# EAGLE board SysnapseWriless-BOB-Stack-v01 (EAGLE 5.10)
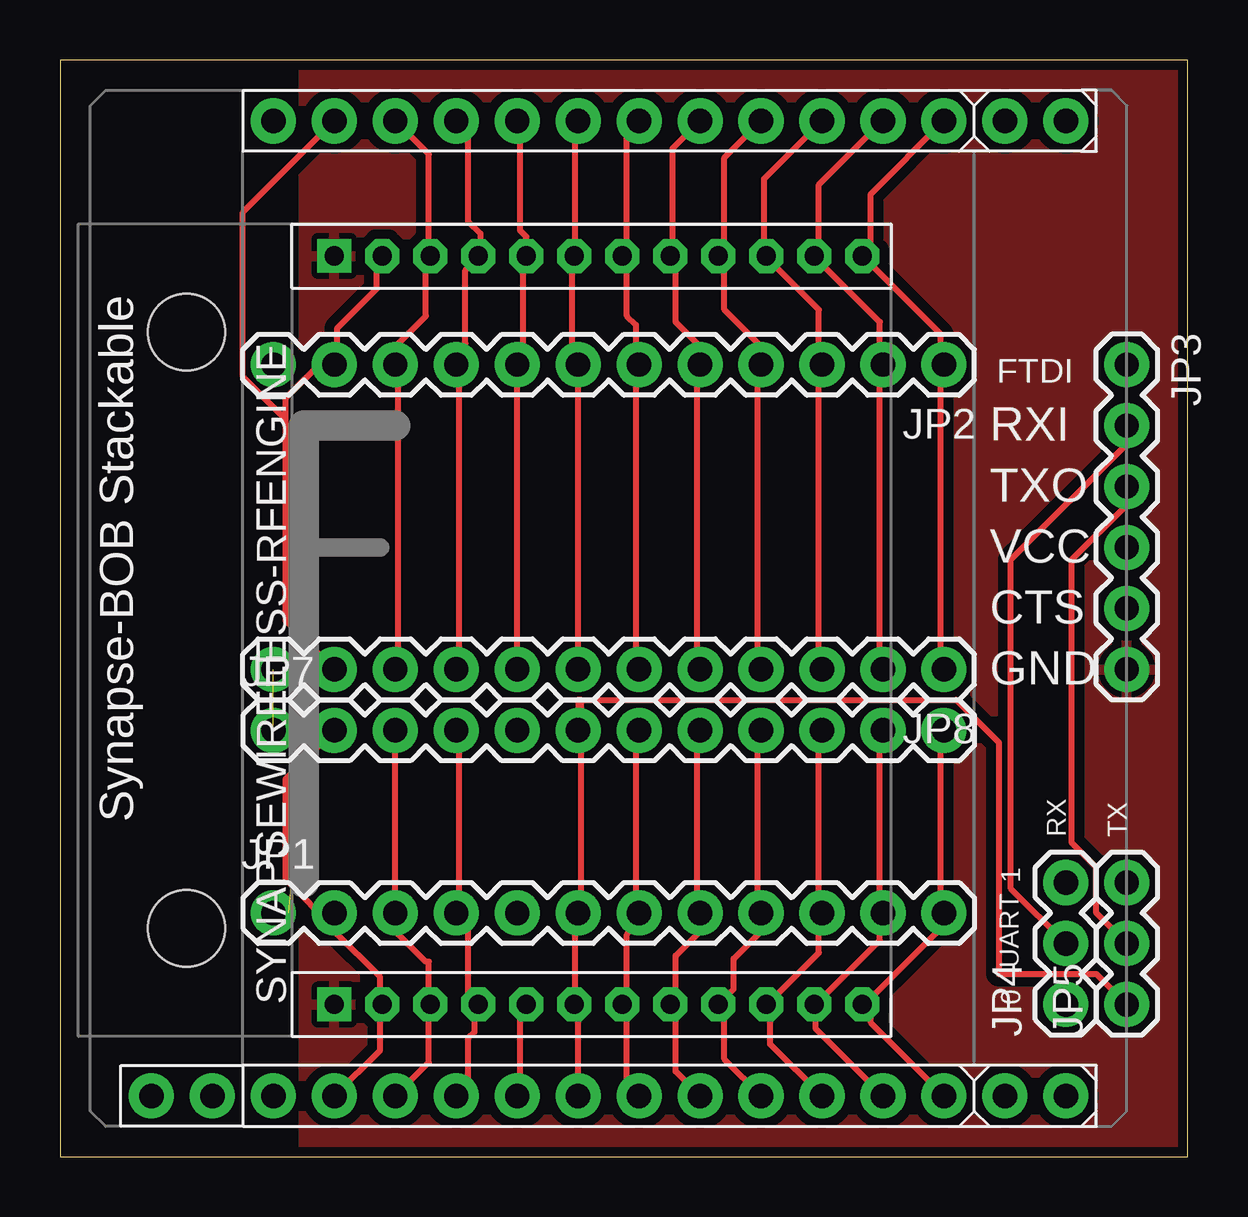
[diagram p0: board, top side]
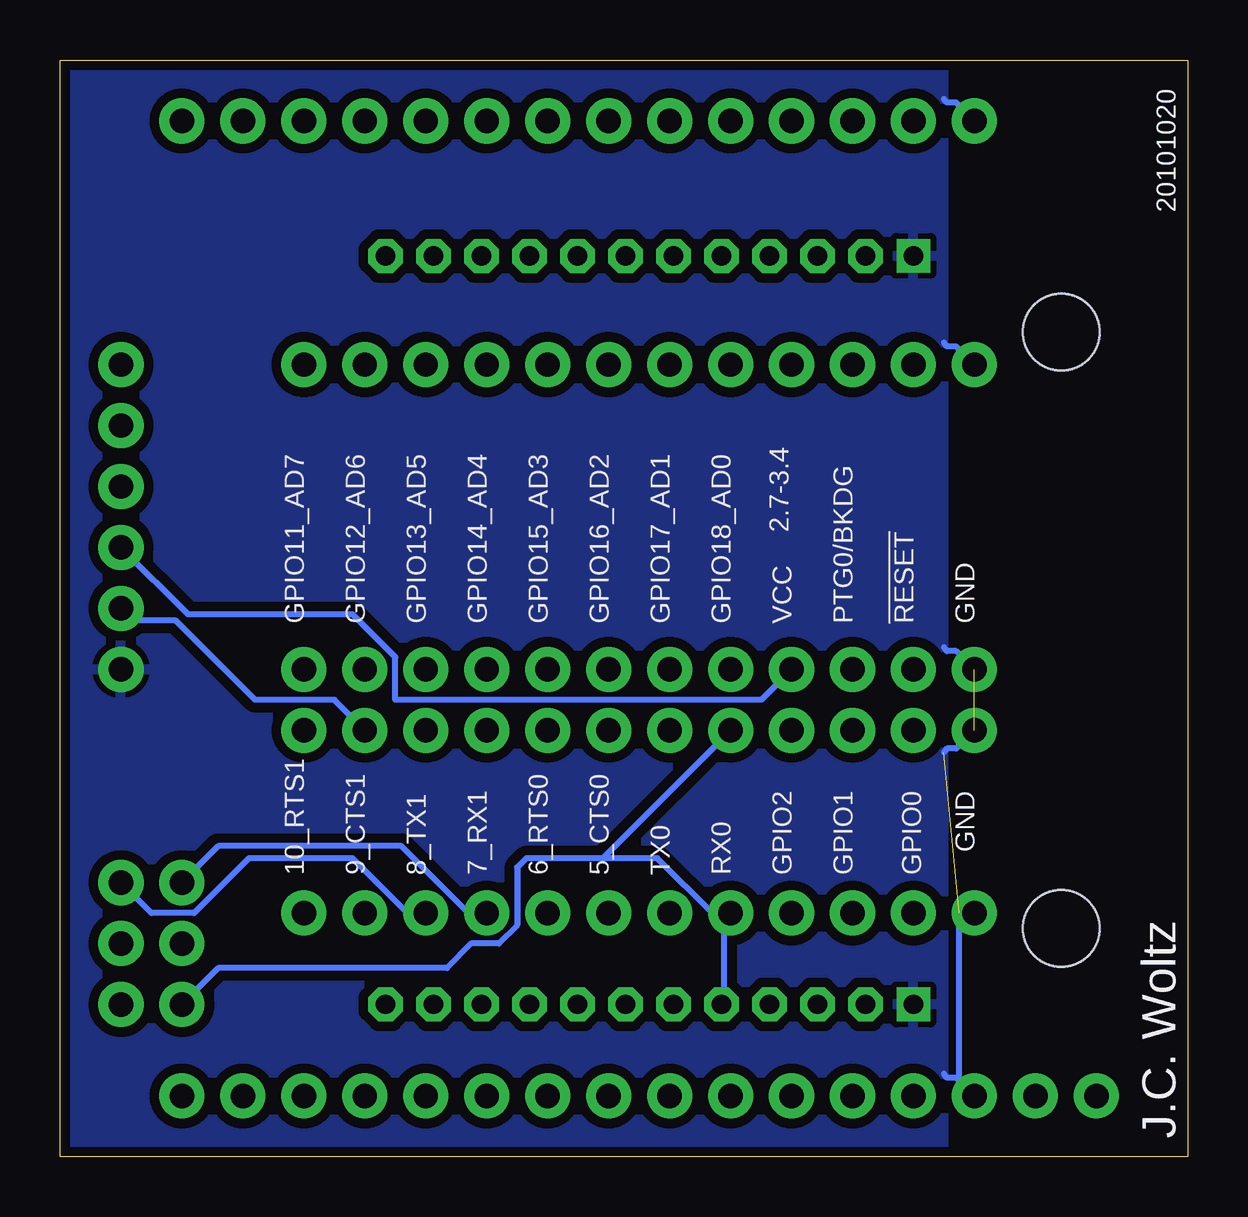
[diagram p1: board, bottom side, seen from below]

Size 46.99 x 45.72 mm. Coordinates in mm from the lower left corner, seen from the top.
Outline: 0,0 46.99,0 46.99,45.72 0,45.72 0,0
Copper layers (1*16): Top 0.0356mm / dielectric 1.5011mm / Bottom 0.0356mm
Design rules "LaenPCBOrder-JCModified": minimum track width 10mil, minimum drill 13mil, track to track 10mil, track to pad 6mil, pad to pad 6mil, via to via 6mil, smd to smd 6mil, copper to edge 15mil, drill to drill 6mil, minimum pad ring 12mil, minimum via ring 7mil, stop-mask expansion 4mil, vias tented up to drill 25mil, thermal gap 10mil

## Footprints (pad centres in the part's own frame; a part is rotated, then mirrored left to right if it is on the bottom)
1X12 = drill 1.016 pad 1.88 round: 1 0,0; 2 2.54,0; 3 5.08,0; 4 7.62,0; 5 10.16,0; 6 12.7,0; 7 15.24,0; 8 17.78,0; 9 20.32,0; 10 22.86,0; 11 25.4,0; 12 27.94,0
1X06 = drill 1.016 pad 1.88 round: 1 0,0; 2 2.54,0; 3 5.08,0; 4 7.62,0; 5 10.16,0; 6 12.7,0
1X03 = drill 1.016 pad 1.88 round: 1 0,0; 2 2.54,0; 3 5.08,0
SYNAPSERFENGINE-THM = drill 0.8 square: 1 0,0; 24 31.2,0 | drill 0.8 pad 1.422 octagon: 2 0,-2; 3 0,-4; 4 0,-6; 5 0,-8; 6 0,-10; 7 0,-12; 8 0,-14; 9 0,-16; 10 0,-18; 11 0,-20; 12 0,-22; 13 31.2,-22; 14 31.2,-20; 15 31.2,-18; 16 31.2,-16; 17 31.2,-14; 18 31.2,-12; 19 31.2,-10; 20 31.2,-8; 21 31.2,-6; 22 31.2,-4; 23 31.2,-2 | hole 3.2: 3.17,6.16; 28.03,6.16
SYNSJ-STACK = drill 1.016 pad 1.88 round: G0 0,-7.62; G1 0,-10.16; G2 0,-12.7; G3 0,-15.24; G4 0,-17.78; G5 0,-20.32; G6 0,-22.86; G7 0,-25.4; G8 0,-27.94; G9 0,-30.48; G10 0,-33.02; G11 40.64,-33.02; G12 40.64,-30.48; G13 40.64,-27.94; G14 40.64,-25.4; G15 40.64,-22.86; G16 40.64,-20.32; G17 40.64,-17.78; G18 40.64,-15.24; GND 0,-5.08; GND1 40.64,-5.08; R1 0,0; R2 0,-2.54; R3 0,-35.56; R4 0,-38.1; R5 40.64,-38.1; R6 40.64,-35.56; RESERVED 40.64,-10.16; RESET 40.64,-7.62; VCC 40.64,-12.7

## Placement (x,y rotation side)
JP1  M12PTH  [1X12]  8.89,10.16 0 top
JP2  M12PTH  [1X12]  36.83,33.02 180 top
JP3  [1X06]  44.45,33.02 270 top
JP4  JUMPER-3PTH  [1X03]  41.91,6.35 90 top
JP5  JUMPER-3PTH  [1X03]  44.45,6.35 90 top
JP7  M12PTH  [1X12]  8.89,17.78 0 top
JP8  M12PTH  [1X12]  36.83,20.32 180 top
SYNAPSEWIRELESS-RFENGINE  SYNAPSEWIRELESS-RFENGINESTD  [SYNAPSERFENGINE-THM]  11.43,6.35 90 top
U$1  SYNAPSE-SJ-STCKINGD30-1600  [SYNSJ-STACK]  3.81,2.54 90 top

## Library data of the parts
JP1-JP5 JP7 JP8 = SparkFun
SYNAPSEWIRELESS-RFENGINE U$1 = 0_jc-custom

## Nets
GND: JP1.1 JP2.12 JP3.6 JP7.1 JP8.12 SYNAPSEWIRELESS-RFENGINE.1 SYNAPSEWIRELESS-RFENGINE.24 U$1.GND U$1.GND1
GPIO0: JP1.2 JP7.2 SYNAPSEWIRELESS-RFENGINE.2 U$1.G0
GPIO1: JP1.3 JP7.3 SYNAPSEWIRELESS-RFENGINE.3 U$1.G1
GPIO2: JP1.4 JP7.4 SYNAPSEWIRELESS-RFENGINE.4 U$1.G2
GPIO3: JP1.5 JP4.1 JP7.5 SYNAPSEWIRELESS-RFENGINE.5 U$1.G3
GPIO4: JP1.6 JP5.1 JP7.6 SYNAPSEWIRELESS-RFENGINE.6 U$1.G4
GPIO5: JP1.7 JP7.7 SYNAPSEWIRELESS-RFENGINE.7 U$1.G5
GPIO6: JP1.8 JP7.8 SYNAPSEWIRELESS-RFENGINE.8 U$1.G6
GPIO7: JP1.9 JP4.3 JP7.9 SYNAPSEWIRELESS-RFENGINE.9 U$1.G7
GPIO8: JP1.10 JP5.3 JP7.10 SYNAPSEWIRELESS-RFENGINE.10 U$1.G8
GPIO9: JP1.11 JP3.5 JP7.11 SYNAPSEWIRELESS-RFENGINE.11 U$1.G9
GPIO10: JP1.12 JP7.12 SYNAPSEWIRELESS-RFENGINE.12 U$1.G10
GPIO11: JP2.1 JP8.1 SYNAPSEWIRELESS-RFENGINE.13 U$1.G11
GPIO12: JP2.2 JP8.2 SYNAPSEWIRELESS-RFENGINE.14 U$1.G12
GPIO13: JP2.3 JP8.3 SYNAPSEWIRELESS-RFENGINE.15 U$1.G13
GPIO14: JP2.4 JP8.4 SYNAPSEWIRELESS-RFENGINE.16 U$1.G14
GPIO15: JP2.5 JP8.5 SYNAPSEWIRELESS-RFENGINE.17 U$1.G15
GPIO16: JP2.6 JP8.6 SYNAPSEWIRELESS-RFENGINE.18 U$1.G16
GPIO17: JP2.7 JP8.7 SYNAPSEWIRELESS-RFENGINE.19 U$1.G17
GPIO18: JP2.8 JP8.8 SYNAPSEWIRELESS-RFENGINE.20 U$1.G18
N$3: JP2.10 JP8.10 SYNAPSEWIRELESS-RFENGINE.22 U$1.RESERVED
N$7: JP3.1
RESET_L: JP2.11 JP8.11 SYNAPSEWIRELESS-RFENGINE.23 U$1.RESET
RXI: JP3.2 JP4.2
TXO: JP3.3 JP5.2
VCC: JP2.9 JP3.4 JP8.9 SYNAPSEWIRELESS-RFENGINE.21 U$1.VCC

## Tracks (layer width: path | path; a pad name or v marks a point on that pad's centre or on a via)
GND  (2 unrouted)
  Bottom 0.254: 9.59,3.24 9.65,3.3 10.03,3.3 10.16,3.46 | U$1.GND 9.59,3.24 | JP1.1 9.53,10.16 9.53,3.3 9.59,3.24 | JP7.1 9.65,17.02 10.03,17.02 10.16,16.86 | JP8.12 9.65,21.08 10.03,21.08 10.16,21.24 | JP2.12 9.65,33.78 10.03,33.78 10.16,33.94 | U$1.GND1 9.65,43.94 10.03,43.94 10.16,44.1
  pour Bottom (isolate 0.406): 10.16,45.72 46.99,45.72 46.99,-1.27 10.16,-1.27
  pour Top (isolate 0.406): 10.16,45.72 46.99,45.72 46.99,-1.27 10.16,-1.27
GPIO0
  Top 0.254: 13.34,6.35 13.34,7.49 11.43,9.4 11.43,9.53 | U$1.G0 13.34,4.45 13.34,6.35 | 13.34,6.35 SYNAPSEWIRELESS-RFENGINE.2 | JP7.2 9.4,15.75 9.4,11.56 11.43,9.53 | 11.43,9.53 JP1.2
GPIO1
  Top 0.254: 15.37,6.35 15.37,8.13 15.24,8.13 13.97,9.4 JP1.3 JP7.3 | U$1.G1 15.37,3.94 15.37,6.35 | 15.37,6.35 SYNAPSEWIRELESS-RFENGINE.3
GPIO2
  Top 0.254: U$1.G2 17.02,3.05 17.02,4.95 17.27,5.21 17.27,6.35 SYNAPSEWIRELESS-RFENGINE.4 17.4,6.35 17.02,6.73 17.02,9.65 JP1.4 16.64,10.16 16.64,17.65 JP7.4
GPIO3
  Top 0.254: U$1.G3 19.18,2.67 19.18,6.22 19.3,6.35 SYNAPSEWIRELESS-RFENGINE.5
  Bottom 0.254: 19.3,10.16 19.3,6.35 SYNAPSEWIRELESS-RFENGINE.5 | JP4.1 40.39,7.87 30.86,7.87 29.84,8.89 28.7,8.89 27.94,9.65 27.94,12.07 27.56,12.45 24.38,12.45 | 24.38,12.45 22.1,12.45 19.81,10.16 19.3,10.16 | 19.3,10.16 JP1.5 | 24.38,12.45 JP7.5
GPIO4
  Top 0.254: 21.46,6.35 21.46,10.16 JP1.6 21.72,10.29 21.72,19.05 | U$1.G4 21.59,6.35 21.46,6.35 | 21.46,6.35 SYNAPSEWIRELESS-RFENGINE.6 | JP5.1 43.18,7.62 39.12,7.62 39.12,17.27 37.34,19.05 21.72,19.05 | 21.72,19.05 21.59,19.05 JP7.6
GPIO5
  Top 0.254: U$1.G5 23.62,3.05 23.62,6.35 SYNAPSEWIRELESS-RFENGINE.7 23.5,6.35 23.62,6.48 23.62,9.27 24.13,9.78 JP1.7 24,9.78 24,17.65 JP7.7
GPIO6
  Top 0.254: U$1.G6 25.65,3.56 25.65,6.35 SYNAPSEWIRELESS-RFENGINE.8 25.53,6.35 25.65,6.48 25.65,8.38 26.67,9.4 JP1.8 26.54,9.4 26.54,17.65 JP7.8
GPIO7
  Top 0.254: U$1.G7 27.69,4.06 27.69,6.48 SYNAPSEWIRELESS-RFENGINE.9 28.07,6.99 28.07,8.26 29.21,9.4 JP1.9 29.08,9.4 29.08,17.65 JP7.9
  Bottom 0.254: JP4.3 40.39,12.95 32.77,12.95 29.97,10.16 JP1.9
GPIO8
  Top 0.254: U$1.G8 29.59,4.7 29.59,6.35 SYNAPSEWIRELESS-RFENGINE.10 29.46,6.35 31.62,8.51 31.62,10.03 JP1.10 31.62,10.16 31.62,17.65 JP7.10
  Bottom 0.254: JP5.3 43.18,10.16 41.4,10.16 39.12,12.45 34.8,12.45 32.51,10.16 JP1.10
GPIO9
  Top 0.254: 31.5,6.35 34.16,9.02 34.16,10.03 JP1.11 34.16,10.16 34.16,17.65 JP7.11 | U$1.G9 31.5,5.33 31.5,6.35 | 31.5,6.35 SYNAPSEWIRELESS-RFENGINE.11
  Bottom 0.254: JP3.5 43.94,22.35 42.16,22.35 38.86,19.05 35.56,19.05 JP7.11
GPIO10
  Top 0.254: U$1.G10 33.78,5.59 33.78,6.48 SYNAPSEWIRELESS-RFENGINE.12 33.53,6.35 36.83,9.65 JP1.12 36.7,9.65 36.7,17.65 JP7.12
GPIO11
  Top 0.254: JP8.1 36.7,20.45 36.7,33.02 JP2.1 36.7,33.15 36.7,34.29 33.53,37.46 SYNAPSEWIRELESS-RFENGINE.13 33.78,37.34 33.78,40.13 U$1.G11
GPIO12
  Top 0.254: JP8.2 34.16,20.45 34.16,33.02 JP2.2 34.16,33.15 34.16,34.8 31.5,37.46 SYNAPSEWIRELESS-RFENGINE.14 31.62,37.46 31.62,40.51 U$1.G12
GPIO13
  Top 0.254: JP8.3 31.62,20.45 31.62,33.02 JP2.3 31.62,33.15 31.62,35.31 29.46,37.46 SYNAPSEWIRELESS-RFENGINE.15 29.34,37.59 29.34,40.77 U$1.G13
GPIO14
  Top 0.254: JP8.4 29.08,20.45 29.08,33.78 JP2.4 29.21,33.78 27.69,35.31 27.69,37.21 27.43,37.46 SYNAPSEWIRELESS-RFENGINE.16 27.69,37.34 27.69,41.66 U$1.G14
GPIO15
  Top 0.254: JP8.5 26.54,20.45 26.54,33.78 JP2.5 26.67,33.78 25.65,34.8 25.65,37.34 25.53,37.46 SYNAPSEWIRELESS-RFENGINE.17 25.53,37.59 25.53,42.04 U$1.G15
GPIO16
  Top 0.254: JP8.6 24,20.45 24,33.02 JP2.6 24,33.15 24,34.67 23.62,35.05 23.62,37.34 23.5,37.46 SYNAPSEWIRELESS-RFENGINE.18 23.62,37.46 23.62,42.67 U$1.G16
GPIO17
  Top 0.254: JP8.7 JP2.7 21.34,33.02 21.34,37.46 SYNAPSEWIRELESS-RFENGINE.19 21.46,37.59 21.46,43.05 U$1.G17
GPIO18
  Top 0.254: JP8.8 JP2.8 19.3,33.02 19.3,37.46 SYNAPSEWIRELESS-RFENGINE.20 19.43,37.59 19.43,38.35 19.18,38.61 19.18,43.05 U$1.G18
N$3
  Top 0.254: JP8.10 14.1,20.45 14.1,33.78 JP2.10 13.97,33.78 15.24,35.05 15.24,37.34 15.37,37.46 SYNAPSEWIRELESS-RFENGINE.22 15.37,37.59 15.37,41.78 U$1.RESERVED
RESET_L
  Top 0.254: 11.56,33.78 11.56,33.15 JP2.11 11.56,33.78 | 11.56,33.78 11.56,34.54 13.21,36.2 13.21,37.34 13.34,37.46 SYNAPSEWIRELESS-RFENGINE.23 | JP8.11 9.4,22.35 9.4,30.73 | 9.4,30.73 9.4,31.62 11.56,33.78 | U$1.RESET 7.62,39.37 7.62,32.51 9.4,30.73
RXI
  Top 0.254: JP4.2 39.62,11.18 39.62,24.89 44.45,29.72 JP3.2
TXO
  Top 0.254: JP5.2 43.18,10.16 43.18,12.07 42.16,13.08 42.16,24.89 44.45,27.18 JP3.3
VCC
  Top 0.254: JP8.9 16.64,20.45 16.64,33.53 JP2.9 16.51,33.53 16.89,33.91 16.89,36.96 17.4,37.46 SYNAPSEWIRELESS-RFENGINE.21 17.53,37.59 17.53,38.48 17.02,38.99 17.02,42.67 U$1.VCC
  Bottom 0.254: JP3.4 41.66,22.61 34.8,22.61 33.02,20.83 33.02,19.05 17.78,19.05 JP8.9

## Text on the board
tPlace: FTDI | RXI | TXO | VCC | CTS | GND | Synapse-BOB Stackable | RX | TX | 1 | UART | 0
bPlace: 20101020 | 2.7-3.4 | GND | !RESET | PTG0/BKDG | VCC | GPIO18_AD0 | GPIO17_AD1 | GPIO16_AD2 | GPIO15_AD3 | GPIO14_AD4 | GPIO13_AD5 | GPIO12_AD6 | GPIO11_AD7 | GND | GPIO0 | GPIO1 | GPIO2 | RX0 | TX0 | 5_CTS0 | 6_RTS0 | 7_RX1 | 8_TX1 | 9_CTS1 | 10_RTS1 | J.C. Woltz